# EAGLE board Lynx DOS Interface V10A (EAGLE 7.5.0)
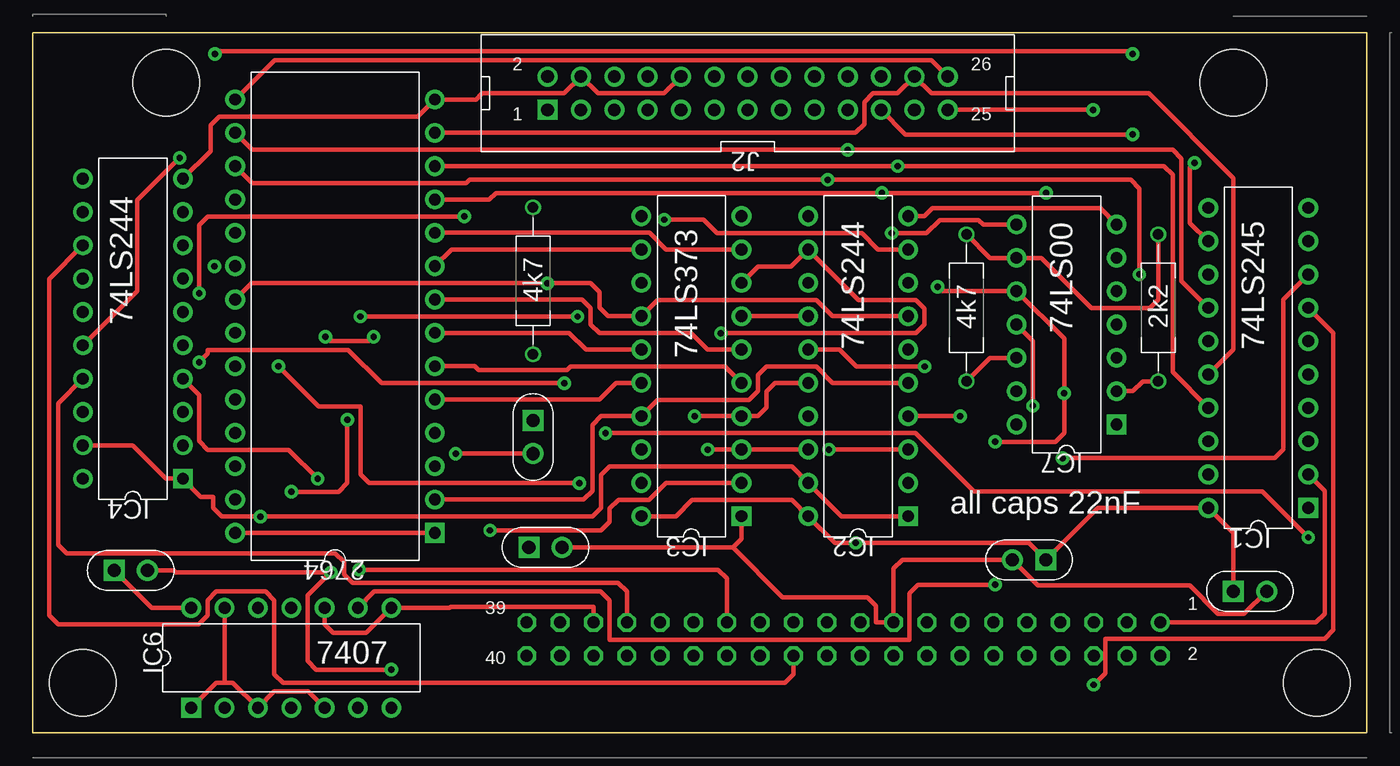
[diagram p0: board, top side]
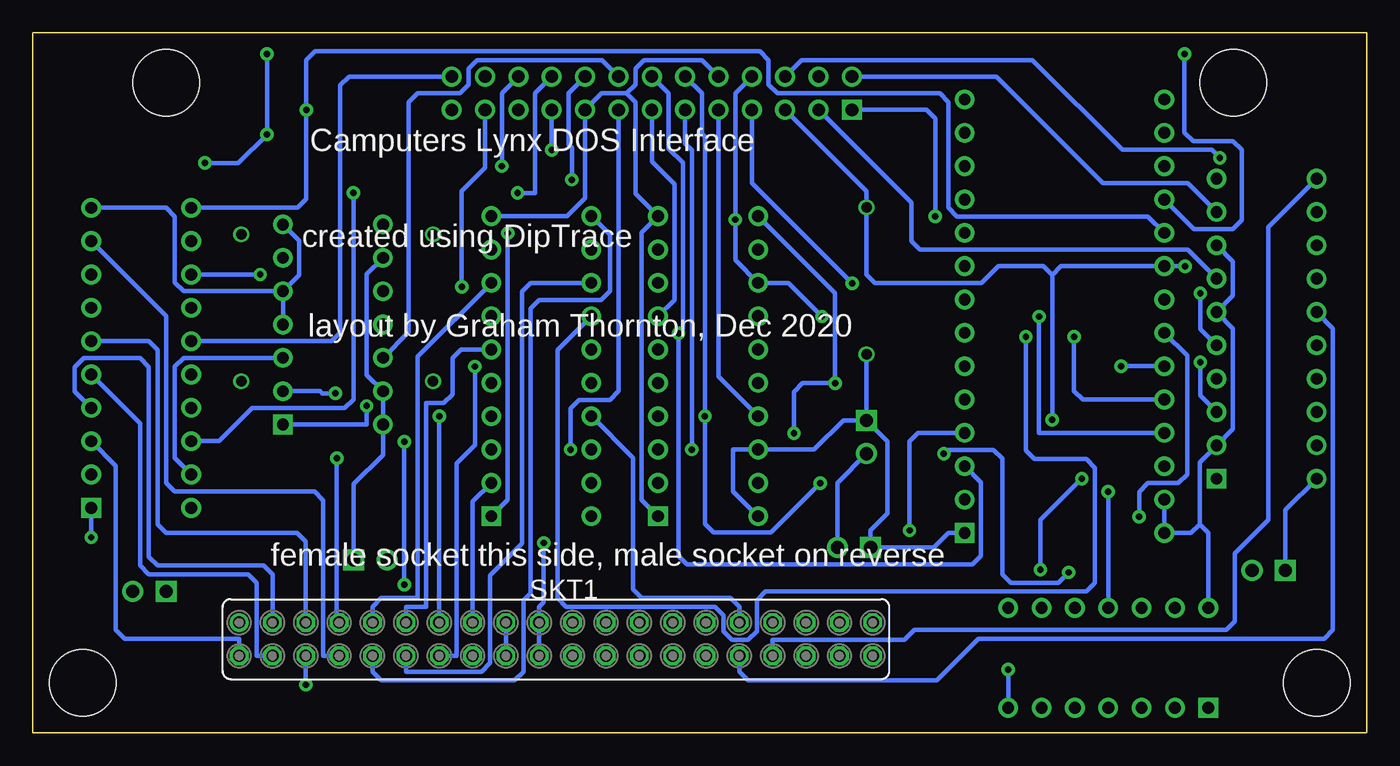
[diagram p1: board, bottom side, seen from below]

Size 101.6 x 53.34 mm. Coordinates in mm from the lower left corner, seen from the top.
Outline: 0,53.34 101.6,53.34 101.6,0 0,0 0,53.34
Copper layers (1*16): Top 0.035mm / dielectric 1.5mm / Bottom 0.035mm
Design rules "default *": minimum track width 10mil, minimum drill 0.61mm, track to track 8mil, track to pad 8mil, pad to pad 8mil, via to via 8mil, smd to smd 8mil, copper to edge 40mil, drill to drill 8mil, minimum pad ring 0mil, minimum via ring 8mil, stop-mask expansion 2mil, vias tented up to drill 19mil, thermal gap 10mil
Net classes: 0 default: width 0.33 mm, clearance 0.33 mm
Holes 5.08 mm at 10.16,49.53 97.79,3.81 3.81,3.81 91.44,49.53

## Footprints (pad centres in the part's own frame; a part is rotated, then mirrored left to right if it is on the bottom)
DIP-28/600mil = drill 0.9 pad 1.5 square: 1 -7.6,16.51 | drill 0.9 pad 1.5: 2 -7.6,13.97; 3 -7.6,11.43; 4 -7.6,8.89; 5 -7.6,6.35; 6 -7.6,3.81; 7 -7.6,1.27; 8 -7.6,-1.27; 9 -7.6,-3.81; 10 -7.6,-6.35; 11 -7.6,-8.89; 12 -7.6,-11.43; 13 -7.6,-13.97; 14 -7.6,-16.51; 15 7.6,-16.51; 16 7.6,-13.97; 17 7.6,-11.43; 18 7.6,-8.89; 19 7.6,-6.35; 20 7.6,-3.81; 21 7.6,-1.27; 22 7.6,1.27; 23 7.6,3.81; 24 7.6,6.35; 25 7.6,8.89; 26 7.6,11.43; 27 7.6,13.97; 28 7.6,16.51
CAP-2.54/6.6x3 = drill 1 pad 1.6 square: 1 -1.27,0 | drill 1 pad 1.6: 2 1.27,0
DIP-20 = drill 0.9 pad 1.5 square: 1 -3.81,11.43 | drill 0.9 pad 1.5: 2 -3.81,8.89; 3 -3.81,6.35; 4 -3.81,3.81; 5 -3.81,1.27; 6 -3.81,-1.27; 7 -3.81,-3.81; 8 -3.81,-6.35; 9 -3.81,-8.89; 10 -3.81,-11.43; 11 3.81,-11.43; 12 3.81,-8.89; 13 3.81,-6.35; 14 3.81,-3.81; 15 3.81,-1.27; 16 3.81,1.27; 17 3.81,3.81; 18 3.81,6.35; 19 3.81,8.89; 20 3.81,11.43
DIP-14 = drill 0.9 pad 1.5 square: 1 -3.81,7.62 | drill 0.9 pad 1.5: 2 -3.81,5.08; 3 -3.81,2.54; 4 -3.81,0; 5 -3.81,-2.54; 6 -3.81,-5.08; 7 -3.81,-7.62; 8 3.81,-7.62; 9 3.81,-5.08; 10 3.81,-2.54; 11 3.81,0; 12 3.81,2.54; 13 3.81,5.08; 14 3.81,7.62
IDC26M = drill 0.965 pad 1.524 square: 1 15.24,1.27 | drill 0.965 pad 1.524: 2 15.24,-1.27; 3 12.7,1.27; 4 12.7,-1.27; 5 10.16,1.27; 6 10.16,-1.27; 7 7.62,1.27; 8 7.62,-1.27; 9 5.08,1.27; 10 5.08,-1.27; 11 2.54,1.27; 12 2.54,-1.27; 13 0,1.27; 14 0,-1.27; 15 -2.54,1.27; 16 -2.54,-1.27; 17 -5.08,1.27; 18 -5.08,-1.27; 19 -7.62,1.27; 20 -7.62,-1.27; 21 -10.16,1.27; 22 -10.16,-1.27; 23 -12.7,1.27; 24 -12.7,-1.27; 25 -15.24,1.27; 26 -15.24,-1.27
RESAD1120W55L680D260 = drill 0.8 pad 1.2: 1 -5.6,0; 2 5.6,0
FE20-2 = drill 0.914 pad 1.422: 1 -24.13,1.27 | drill 0.914 pad 1.422 octagon: 2 -24.13,-1.27; 3 -21.59,1.27; 4 -21.59,-1.27; 5 -19.05,1.27; 6 -19.05,-1.27; 7 -16.51,1.27; 8 -16.51,-1.27; 9 -13.97,1.27; 10 -13.97,-1.27; 11 -11.43,1.27; 12 -11.43,-1.27; 13 -8.89,1.27; 14 -8.89,-1.27; 15 -6.35,1.27; 16 -6.35,-1.27; 17 -3.81,1.27; 18 -3.81,-1.27; 19 -1.27,1.27; 20 -1.27,-1.27; 21 1.27,1.27; 22 1.27,-1.27; 23 3.81,1.27; 24 3.81,-1.27; 25 6.35,1.27; 26 6.35,-1.27; 27 8.89,1.27; 28 8.89,-1.27; 29 11.43,1.27; 30 11.43,-1.27; 31 13.97,1.27; 32 13.97,-1.27; 33 16.51,1.27; 34 16.51,-1.27; 35 19.05,1.27; 36 19.05,-1.27; 37 21.59,1.27; 38 21.59,-1.27; 39 24.13,1.27; 40 24.13,-1.27

## Placement (x,y rotation side)
2764  M2764AF6  [DIP-28/600mil]  23.02,31.75 180 top
C1  CAP  [CAP-2.54/6.6x3]  39.05,14.13 0 top
C2  CAP  [CAP-2.54/6.6x3]  38.1,22.54 270 top
C3  CAP  [CAP-2.54/6.6x3]  92.71,10.8 0 top
C4  CAP  [CAP-2.54/6.6x3]  75.88,13.18 180 top
C5  CAP  [CAP-2.54/6.6x3]  7.46,12.38 0 top
IC1  DM74LS245N  [DIP-20]  93.34,28.57 180 top
IC2  DM74LS244N  [DIP-20]  62.86,27.94 180 top
IC3  SN74LS373N  [DIP-20]  50.16,27.94 180 top
IC4  DM74LS244N  [DIP-20]  7.62,30.8 180 top
IC6  DM7407N  [DIP-14]  19.68,5.71 90 top
IC7  SN74LS00N  [DIP-14]  78.74,31.12 180 top
J2  IDC2X13M  [IDC26M]  54.45,48.74 180 top
R4  2k2  [RESAD1120W55L680D260]  85.72,32.38 90 top
R5  4k7  [RESAD1120W55L680D260]  71.12,32.38 90 top
R6  4k7  [RESAD1120W55L680D260]  38.1,34.45 90 top
SKT1  FE20-2  [FE20-2]  61.75,7.14 0 bottom

## Library data of the parts
2764 = common; DATASHEET: http://datasheets.diptrace.com/st_micro/M2764A.pdf; MANUFACTURER: ST Microelectronics
C1-C5 J2 = common
IC1 = common; DATASHEET: http://datasheets.diptrace.com/fairchild/DM74LS245.pdf; MANUFACTURER: Fairchild
IC2 IC4 = common; DATASHEET: http://datasheets.diptrace.com/fairchild/DM74LS244.pdf; MANUFACTURER: Fairchild
IC3 = common; MANUFACTURER: ON Semiconductor
IC6 = common; DATASHEET: http://datasheets.diptrace.com/fairchild/DM7407.pdf; MANUFACTURER: Fairchild
IC7 = common; DATASHEET: http://datasheets.diptrace.com/ti/SN5400.pdf; MANUFACTURER: Texas Instruments
R4-R6 = common; DATASHEET: http://datasheets.diptrace.com/yageo/cfr.pdf; MANUFACTURER: Yageo; PART_NUMBER_(DIGI-KEY): 1.0KQBK-ND; UNIQUE_NAME: YAGEO_CFR-25
SKT1 = common; OC_FARNELL: unknown; OC_NEWARK: unknown

## Nets
GND: 2764.14 C1.2 C2.2 C3.2 C4.2 C5.2 IC1.10 IC2.10 IC3.1 IC3.10 IC4.10 IC6.7 IC7.4 IC7.5 IC7.7 J2.4 J2.10 J2.17 SKT1.17 SKT1.18
Net_0: 2764.13 IC1.16 J2.24
Net_1: 2764.15 IC1.15 J2.26
Net_2: 2764.16 IC1.14 J2.19
Net_3: 2764.4 IC3.2
Net_4: IC4.13 SKT1.24
Net_5: IC4.15 SKT1.32
Net_6: IC4.11 SKT1.34
Net_7: IC6.8 IC6.10 SKT1.35
Net_8: IC4.17 SKT1.33
Net_9: IC4.4 SKT1.27
Net_10: IC7.1 IC7.11
Net_11: 2764.19 IC1.11 J2.25
Net_12: IC6.1 IC6.3 IC6.5 IC6.13
Net_13: 2764.11 IC1.18 J2.20
Net_14: 2764.25 IC2.9 IC3.13 J2.8
Net_15: 2764.12 IC1.17 J2.22
Net_16: IC2.11 SKT1.10
Net_17: 2764.3 IC2.12 IC3.8 J2.14
Net_18: 2764.23 IC2.16 IC3.4 J2.12
Net_19: IC2.18 IC3.3 J2.11
Net_20: 2764.24 IC2.14 IC3.7 J2.13
Net_21: 2764.17 IC1.13 J2.18
Net_22: IC2.3 J2.15
Net_23: 2764.2 IC2.5 IC3.17 J2.9
Net_24: 2764.21 IC2.7 IC3.14 J2.7
Net_25: IC4.5 J2.1
Net_26: 2764.22 IC2.1 IC2.19 IC4.1 IC4.19 IC7.8
Net_28: IC6.9 IC7.2 IC7.10 J2.23 R4.1
Net_29: 2764.1 2764.27 2764.28 C1.1 C2.1 C3.1 C4.1 C5.1 IC1.20 IC2.20 IC3.18 IC3.20 IC4.2 IC4.6 IC4.8 IC4.20 IC6.14 IC7.9 IC7.13 IC7.14 R4.2 R5.2 R6.1 SKT1.19 SKT1.20
Net_30: IC1.19 IC7.3
Net_31: IC1.1 IC3.11 IC4.3
Net_32: 2764.20 IC6.11 J2.5 R6.2
Net_33: IC1.2 SKT1.1
Net_34: IC1.3 SKT1.2
Net_35: IC1.4 SKT1.3
Net_36: IC1.7 SKT1.6
Net_37: IC1.5 SKT1.4
Net_38: IC1.6 SKT1.5
Net_39: IC1.8 SKT1.7
Net_40: IC1.9 SKT1.8
Net_41: IC2.2 SKT1.15
Net_42: IC2.4 SKT1.13
Net_43: IC2.6 SKT1.11
Net_44: IC2.8 SKT1.9
Net_45: 2764.18 IC1.12 J2.21
Net_46: IC2.13 SKT1.12
Net_47: IC2.15 SKT1.14
Net_48: IC2.17 SKT1.31
Net_50: 2764.6 IC3.5
Net_51: 2764.8 IC3.6
Net_52: 2764.10 IC3.9
Net_53: 2764.5 IC3.16
Net_54: 2764.7 IC3.15
Net_55: 2764.9 IC3.12
Net_56: IC4.9 J2.2
Net_57: IC4.7 J2.3
Net_58: IC4.16 J2.6
Net_59: IC7.12 J2.16 R5.1

## Tracks (layer width: path | path; a pad name or v marks a point on that pad's centre or on a via)
GND  (via drill 0.49 pad 1.02)
  Top 0.33: J2.10 48.09,48.72 43.03,48.72 J2.4 40.47,48.72 34.23,48.72 33.77,48.26 2764.14 29.32,46.97 14.19,46.97 13.53,46.3 13.53,44.33 IC4.10 | C1.2 53.31,14.13 | 53.31,14.13 57.12,10.33 63.57,10.33 64.23,9.67 64.23,8.41 SKT1.17 65.56,12.52 66.22,13.18 C4.2 76.57,11.22 88.13,11.22 90.27,9.07 92.26,9.07 C3.2 | IC3.1 53.97,14.79 53.31,14.13 | IC2.10 67.92,39.37 68.53,39.98 81.31,39.98 IC7.7 | C5.2 10.74,12.38 10.9,12.23 v22.69,12.23 20.93,10.47 20.93,5.47 21.59,4.81 v27.3,4.81 | C2.2 v32.21,21.27
  Bottom 0.33: IC2.10 60.92,39.37 59.53,40.76 J2.17 58.27,48.72 56.37,48.72 | IC7.7 81.31,37.49 81.31,34.9 IC7.5 | C2.2 40.32,19.05 C1.2 | 56.37,48.72 55.71,48.06 55.71,41.1 IC3.10 55.22,38.12 55.22,17.75 IC3.1 | v27.3,4.81 IC6.7 | SKT1.17 SKT1.18 | IC7.5 IC7.4 | v22.69,12.23 23.49,11.43 27.1,11.43 27.76,12.09 27.76,20.91 28.42,21.57 31.91,21.57 v32.21,21.27 | J2.10 50.63,51.26 55.05,51.26 55.71,50.6 55.71,49.38 56.37,48.72 | IC7.5 90.12,33.66 90.78,34.31 90.78,39.34 91.44,40.01 IC1.10 | v32.21,21.27
Net_0
  Top 0.33: 2764.13 62.67,45.72 63.33,46.38 63.33,48.06 63.99,48.72 65.87,48.72 J2.24 68.43,48.72 85,48.72 91.44,42.28 91.44,29.21 IC1.16
Net_1
  Top 0.33: J2.26 68.43,51.26 18.42,51.26 2764.15
  Bottom 0.33: J2.26 77.52,50.01 78.18,49.35 78.18,30.5 78.84,29.84 IC1.15
Net_2  (via drill 0.49 pad 1.02)
  Top 0.33: 2764.16 16.71,44.42 v62.07,44.42 86.82,44.42 87.48,43.77 87.48,34.44 IC1.14
  Bottom 0.33: v62.07,44.42 J2.19
Net_3  (via drill 0.49 pad 1.02)
  Top 0.33: v34.82,15.42 43.28,15.42 43.94,16.08 43.94,17.09 44.6,17.75 46.95,17.75 48.25,19.05 IC3.2
  Bottom 0.33: v34.82,15.42 34.82,22.2 34.16,22.86 2764.4
Net_4
  Top 0.33: SKT1.24 57.94,4.47 57.28,3.81 19.05,3.81 18.39,4.47 18.39,10.11 17.73,10.77 13.97,10.77 13.31,10.11 13.31,8.94 12.65,8.28 1.92,8.28 1.26,8.94 1.26,34.59 IC4.13
Net_5
  Bottom 0.33: SKT1.32 47.78,4.67 47.12,4.01 32.73,4.01 29.56,7.18 3.22,7.18 2.56,7.84 2.56,30.82 IC4.15
Net_6
  Bottom 0.33: SKT1.34 45.24,7.08 35.19,7.08 34.43,7.84 10.69,7.84 10.03,8.5 10.03,13.68 7.49,16.22 7.49,38.55 IC4.11
Net_7
  Top 0.33: IC6.10 22.22,8.28 22.88,7.62 25.4,7.62 IC6.8 31.73,9.52 31.83,9.62 42.7,9.62 SKT1.35
Net_8
  Top 0.33: SKT1.33 45.24,10.77 44.58,11.43 24.36,11.43 23.7,12.09 23.7,13.02 23.04,13.68 2.58,13.68 1.92,14.34 1.92,25.09 IC4.17
Net_9  (via drill 0.49 pad 1.02)
  Top 0.33: v24.85,12.43 52.2,12.43 52.86,11.77 SKT1.27 | v21.69,19.37 19.49,21.57 13.34,21.57 12.67,22.23 12.67,25.74 IC4.4
  Bottom 0.33: v21.69,19.37 24.85,16.21 v24.85,12.43
Net_10  (via drill 0.49 pad 1.02)
  Top 0.33: v76.17,24.91 76.17,29.87 IC7.11
  Bottom 0.33: v76.17,24.91 76.17,23.5 IC7.1
Net_11  (via drill 0.49 pad 1.02)
  Top 0.33: v80.77,47.47 72.27,47.47 J2.25
  Bottom 0.33: IC1.11 81.43,40.01 80.77,40.66 v80.77,47.47 80.77,51.26 80.11,51.92 46.21,51.92 45.55,51.26 45.55,49.38 44.89,48.72 32.52,48.72 31.86,48.06 31.86,40.01 31.2,39.34 16.66,39.34 2764.19
Net_12
  Top 0.33: IC6.1 13.97,3.81 14.6,3.81 | 14.6,3.81 15.24,3.81 IC6.3 18.39,3.15 20.98,3.15 IC6.5 | 14.6,3.81 IC6.13
Net_13  (via drill 0.49 pad 1.02)
  Top 0.33: v77.18,41.14 v64.67,41.14 35.27,41.14 34.77,40.64 2764.11
  Bottom 0.33: v64.67,41.14 63.33,41.14 63.33,48.75 J2.20 | v77.18,41.14 77.18,25.4 77.84,24.74 84.9,24.74 87.42,22.23 IC1.18
Net_14  (via drill 0.49 pad 1.02)
  Top 0.33: v48.09,39.1 51.07,39.1 52.1,38.08 63.14,38.08 64.39,36.83 IC2.9 | v41.49,31.73 v24.95,31.73
  Bottom 0.33: v41.49,31.73 44.06,34.29 IC3.13 48.09,36.02 v48.09,39.1 48.09,48.75 J2.8 | v24.95,31.73 24.95,22.86 2764.25
Net_15  (via drill 0.49 pad 1.02)
  Top 0.33: 2764.12 v65.87,43.18 86.16,43.18 86.82,42.52 86.82,27.48 IC1.17
  Bottom 0.33: v65.87,43.18 65.87,48.75 J2.22
Net_16
  Bottom 0.33: SKT1.10 75.72,4.67 75.06,4.01 64.89,4.01 64.23,4.67 64.23,10.08 63.68,10.63 63.68,32.34 63.02,32.99 58.31,32.99 57.65,33.66 57.65,37.97 IC2.11
Net_17  (via drill 0.49 pad 1.02)
  Top 0.33: v52.41,30.45 67.26,30.45 67.92,31.12 67.92,32.34 67.26,32.99 62.89,32.99 IC2.12 57.76,35.53 55.22,35.53 IC3.8
  Bottom 0.33: J2.14 53.17,48.72 53.17,44.53 52.07,43.43 52.07,30.8 v52.41,30.45 | v52.41,30.45 52.41,13.49 51.75,12.83 30.03,12.83 29.37,13.49 29.37,19.07 2764.3 | v52.41,30.45
Net_18  (via drill 0.49 pad 1.02)
  Top 0.33: v18.7,27.94 21.77,24.87 24.95,24.87 24.95,19.69 25.61,19.02 v41.62,19.02 | v50.41,24.13 IC3.4 55.22,24.13 55.88,24.79 55.88,26.01 56.54,26.67 IC2.16
  Bottom 0.33: J2.12 50.63,48.72 50.63,45.66 50.41,45.44 v50.41,24.13 50.41,15.93 49.74,15.27 45.38,15.27 v41.62,19.02 | v18.7,27.94 2764.23
Net_19  (via drill 0.49 pad 1.02)
  Top 0.33: v51.41,21.59 IC3.3 56.49,21.59 | 56.49,21.59 | 56.49,21.59 IC2.18
  Bottom 0.33: v51.41,21.59 51.41,44.39 51.91,44.9 J2.11
Net_20  (via drill 0.49 pad 1.02)
  Top 0.33: v25.96,30.19 | IC2.14 IC3.7 | v22.29,30.19 | v25.96,30.19 25.61,29.85 22.63,29.85 v22.29,30.19
  Bottom 0.33: IC3.7 52.73,32.99 52.73,41.8 54.45,43.52 J2.13 | v22.29,30.19 22.29,26.06 21.63,25.4 2764.24 | IC2.14 61.65,29.16 61.65,10.28 60.99,9.62 49.65,9.62 48.99,8.96 48.99,7.74 48.33,7.08 47.11,7.08 46.45,7.74 46.45,10.11 45.79,10.77 21.35,10.77 20.69,11.43 20.69,20.2 21.35,20.86 25.3,20.86 25.96,21.52 v25.96,30.19
Net_21  (via drill 0.49 pad 1.02)
  Top 0.33: v84.29,34.92 84.29,41.49 83.63,42.15 v60.53,42.15 33.26,42.15 33,41.88 16.71,41.88 2764.17
  Bottom 0.33: v60.53,42.15 60.53,44.58 60.79,44.83 60.79,48.75 J2.18 | IC1.13 v84.29,34.92
Net_22  (via drill 0.49 pad 1.02)
  Top 0.33: v60.64,21.59 IC2.3
  Bottom 0.33: v60.64,21.59 60.64,24.71 59.98,25.38 57.65,25.38 56.99,26.04 J2.15
Net_23
  Top 0.33: IC2.5 60.92,26.67 59.68,27.91 55.88,27.91 55.22,27.25 55.22,26.04 54.56,25.38 47.6,25.38 IC3.17 43.28,24.13 42.62,23.47 42.62,18.44 41.96,17.78 2764.2
  Bottom 0.33: IC3.17 49.37,27.15 J2.9
Net_24  (via drill 0.49 pad 1.02)
  Top 0.33: IC2.7 60.92,31.75 59.68,32.99 47.6,32.99 IC3.14 43.81,31.75 43.15,32.41 43.15,33.61 42.49,34.27 v39.19,34.27 16.66,34.27 2764.21
  Bottom 0.33: v39.19,34.27 46.83,41.9 J2.7
Net_25  (via drill 0.49 pad 1.02)
  Top 0.33: v12.67,33.48 12.67,38.69 13.34,39.34 v32.87,39.34
  Bottom 0.33: v32.87,39.34 32.87,46.81 33.53,47.47 J2.1 | v12.67,33.48 12.67,30.77 IC4.5
Net_26  (via drill 0.49 pad 1.02)
  Top 0.33: IC2.1 61.59,16.51 IC2.19 57.81,20.29 43.94,20.29 43.28,19.63 43.28,17.15 42.62,16.48 v17.32,16.48 14.39,16.48 13.73,17.15 13.73,18 12.8,18 IC4.1 10.13,19.37 7.59,21.91 IC4.19 | v65.43,38.08 68.08,38.08 69.08,39.08 72.04,39.08 72.39,38.73 IC7.8
  Bottom 0.33: IC2.1 65.43,17.76 v65.43,38.08 | v17.32,16.48 17.32,18.36 16.66,19.02 14.34,19.02 13.68,19.69 13.68,28.74 2764.22
Net_28  (via drill 0.49 pad 1.02)
  Top 0.33: v68.92,34 | IC7.2 83.79,26.04 84.54,26.79 R4.1 | v73.31,11.28 67.43,11.28 66.77,10.62 66.77,7.08 43.91,7.08 43.91,10.11 43.25,10.77 26.01,10.77 IC6.9 | v73.31,22.18 77.89,22.18 78.56,22.84 v78.56,25.87 78.56,30.03 IC7.10 69.27,33.66 v68.92,34
  Bottom 0.33: v68.92,34 68.92,41.29 67.15,43.06 J2.23 | IC7.2 79.72,26.04 79.56,25.87 v78.56,25.87 | v73.31,11.28 v73.31,22.18
Net_29  (via drill 0.49 pad 1.02)
  Top 0.33: R5.2 72.91,36.2 IC7.9 76.81,36.2 80.64,32.36 85.06,32.36 85.72,33.02 R4.2 | C5.1 9.05,9.52 IC6.14 | IC3.20 48.98,16.51 50.22,17.75 57.81,17.75 IC2.20 61.09,14.47 v62.68,14.47 75.86,14.47 C4.1 81.12,17.14 IC1.20 91.44,15.24 C3.1 | 2764.1 2764.28
  Bottom 0.33: C4.1 77.15,18.95 74.93,21.17 IC7.14 IC7.13 76.17,27.28 76.17,34.95 IC7.9 | 2764.1 31.86,15.24 32.97,14.13 C1.1 37.78,15.42 36.49,16.72 36.49,22.2 C2.1 | C5.1 6.19,16.99 IC4.20 | IC6.14 12.06,15.24 12.72,15.9 | 12.72,15.9 12.72,20.61 IC4.2 10.18,23.15 10.18,30.82 IC4.6 10.18,33.31 10.18,35.9 IC4.8 | SKT1.20 SKT1.19 63.02,9.62 62.68,9.96 v62.68,14.47 | C2.1 R6.1 | 2764.27 2764.28 13.39,15.24 12.72,15.9 | IC3.20 48.26,18.42 48.26,21.59 IC3.18 42.09,21.59 39.87,23.81 C2.1
Net_30
  Bottom 0.33: IC1.19 90.78,20.93 90.78,27.91 90.12,28.57 IC7.3
Net_31  (via drill 0.49 pad 1.02)
  Top 0.33: v97.16,14.9 93.66,18.39 71.67,18.39 67.23,22.84 v43.62,22.84 | v40.49,26.64 26.57,26.64 24.03,29.19 13.34,29.19 13.34,28.89 v12.67,28.23
  Bottom 0.33: v43.62,22.84 43.62,25.98 42.96,26.64 v40.49,26.64 40.49,33.5 IC3.11 | v97.16,14.9 IC1.1 | v12.67,28.23 12.67,25.69 IC4.3
Net_32  (via drill 0.49 pad 1.02)
  Top 0.33: v23.95,23.86 23.95,19.02 23.29,18.36 v19.68,18.36
  Bottom 0.33: J2.5 38.1,41.27 R6.2 38.1,34.93 37.44,34.27 29.36,34.27 28.07,35.56 24.61,35.56 23.95,34.9 | v19.68,18.36 IC6.11 | 23.95,34.9 23.29,35.56 2764.20 v13.83,35.56 | 23.95,34.9 v23.95,23.86
Net_33
  Top 0.33: SKT1.1 97.74,8.41 98.4,9.07 98.4,18.44 IC1.2
Net_34
  Bottom 0.33: SKT1.2 85.88,7.18 94.61,7.18 95.28,7.84 95.28,20.34 IC1.3
Net_35
  Bottom 0.33: SKT1.3 83.34,12.09 84,12.75 92.1,12.75 92.76,13.41 92.76,27.89 93.42,28.55 97.74,28.55 98.4,27.89 98.4,26.01 IC1.4
Net_36  (via drill 0.49 pad 1.02)
  Top 0.33: v80.8,3.66 81.68,4.54 81.68,7.18 98.4,7.18 99.06,7.84 99.06,30.48 IC1.7
  Bottom 0.33: SKT1.6 v80.8,3.66
Net_37
  Bottom 0.33: SKT1.4 84.55,5.87 84.55,11.43 85.21,12.09 92.76,12.09 93.42,12.75 93.42,23.57 IC1.5
Net_38
  Bottom 0.33: SKT1.5 80.8,14.58 81.46,15.24 91.44,15.24 92.1,15.9 92.1,29.19 92.76,29.84 IC1.6
Net_39  (via drill 0.49 pad 1.02)
  Top 0.33: v78.45,20.93 94.59,20.93 95.25,21.59 95.25,33.02 IC1.8
  Bottom 0.33: v78.45,20.93 78.45,8.41 SKT1.7 | SKT1.7
Net_40
  Bottom 0.33: SKT1.8 79.47,5.87 79.47,17.73 80.13,18.39 90.78,18.39 91.44,19.05 91.44,31.75 IC1.9
Net_41
  Bottom 0.33: SKT1.15 68.1,17.62 IC2.2
Net_42  (via drill 0.49 pad 1.02)
  Top 0.33: v70.64,24.13 IC2.4
  Bottom 0.33: SKT1.13 v70.64,24.13
Net_43
  Bottom 0.33: SKT1.11 73.18,9.62 71.65,9.62 71.65,25.13 70.3,25.13 69.64,25.79 69.64,28.55 68.98,29.21 IC2.6
Net_44
  Bottom 0.33: SKT1.9 75.72,9.62 75.06,10.28 72.31,10.28 72.31,28.66 IC2.8
Net_45  (via drill 0.49 pad 1.02)
  Top 0.33: v83.77,45.59 66.48,45.59 J2.21 | v13.87,51.74 | v88.48,43.42 | v83.77,51.74 | v13.87,51.74 14.06,51.92 83.58,51.92 v83.77,51.74 | v88.48,43.42 88.14,43.08 88.14,38.86 IC1.12
  Bottom 0.33: v88.48,43.42 85.94,43.42 v83.77,45.59 v83.77,51.74 | v13.87,51.74 13.87,45.75 13.21,45.09 10.18,45.09 9.52,44.42 9.52,39.05 10.18,38.39 13.17,38.39 2764.18
Net_46
  Bottom 0.33: SKT1.12 73.18,4.67 67.43,4.67 66.77,5.33 66.77,12 64.34,14.42 64.34,33.63 63.68,34.29 IC2.13
Net_47  (via drill 0.49 pad 1.02)
  Top 0.33: v67.92,27.91 62.74,27.91 61.45,29.21 IC2.15
  Bottom 0.33: v67.92,27.91 67.92,21.92 69.31,20.53 69.31,5.87 SKT1.14
Net_48
  Bottom 0.33: SKT1.31 47.78,9.62 48.44,10.28 55.22,10.28 55.88,10.94 55.88,20.96 IC2.17
Net_50
  Top 0.33: IC3.5 52.73,27.91 40.96,27.91 40.7,27.65 33.95,27.65 33.66,27.94 2764.6
Net_51
  Top 0.33: 2764.8 41.83,33.02 42.49,32.36 42.49,31.12 43.15,30.45 50.13,30.45 51.37,29.21 IC3.6
Net_52
  Top 0.33: 2764.10 46.96,38.1 48.23,36.83 IC3.9
Net_53
  Top 0.33: 2764.5 43.15,25.4 44.42,26.67 IC3.16
Net_54
  Top 0.33: IC3.15 42.13,29.21 40.86,30.48 2764.7
Net_55
  Top 0.33: 2764.9 31.89,36.83 IC3.12
Net_56
  Bottom 0.33: IC4.9 13.63,41.88 20.1,41.88 28.22,50.01 J2.2
Net_57
  Bottom 0.33: J2.3 34.67,40.39 34.67,37.47 34.01,36.8 13.63,36.8 IC4.7
Net_58  (via drill 0.49 pad 1.02)
  Top 0.33: v11.19,43.82 7.95,40.57 7.95,33.66 IC4.16
  Bottom 0.33: v11.19,43.82 11.8,44.42 18.62,44.42 25.45,51.26 43.03,51.26 J2.6
Net_59
  Top 0.33: IC7.12 72.91,28.57 R5.1
  Bottom 0.33: IC7.12 72.97,30.54 72.97,48.06 72.31,48.72 69.07,48.72 68.41,49.38 68.41,50.6 67.75,51.26 58.25,51.26 J2.16

## Text on the board
tPlace: 2 / / 1 | 26 / / 25 | J2 | 4k7 | 74LS244 | 4k7 | 2k2 | 74LS00 | 74LS244 | 74LS245 | 74LS373 | IC7 | IC4 | all caps 22nF | IC3 | IC2 | IC1 | 2764 | 39 / / 40 | 1 / / 2 | 7407 | IC6
bPlace: Camputers Lynx DOS Interface | created using DipTrace | layout by Graham Thornton, Dec 2020 | female socket this side, male socket on reverse | SKT1